# EAGLE board Thin_Spacer_B (EAGLE 9.5.2)
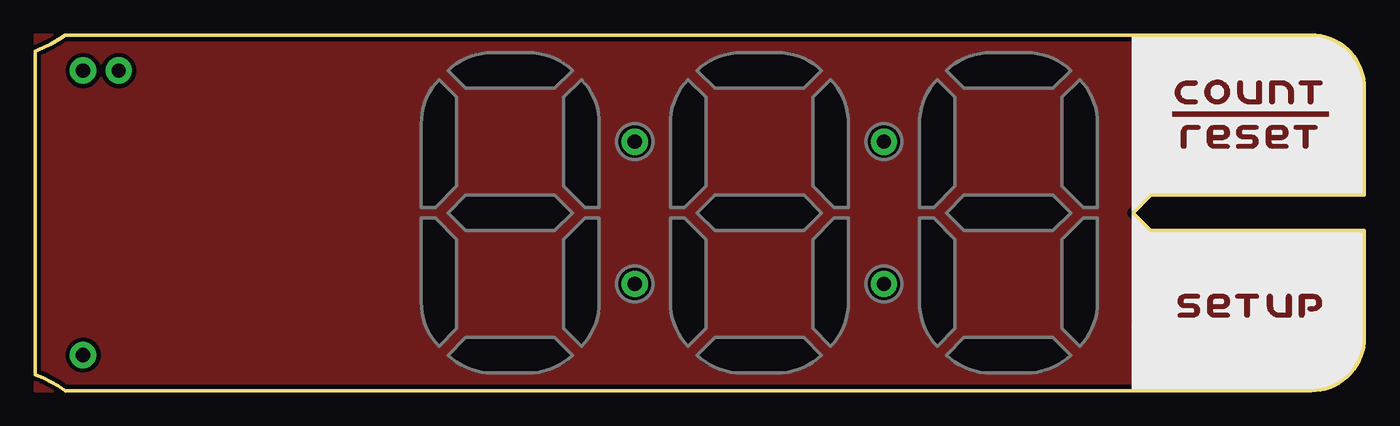
[diagram p0: board, top side]
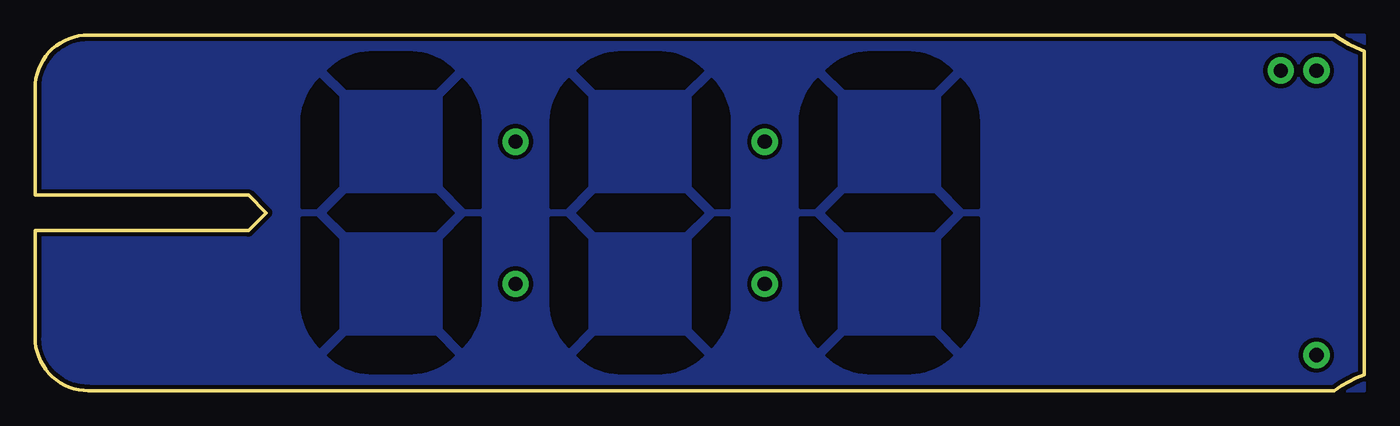
[diagram p1: board, bottom side, seen from below]

Size 94.87 x 25.4 mm. Coordinates in mm from the lower left corner, seen from the top.
Outline: 94.87,21.59 94.87,13.97 79.63,13.97 78.36,12.7 79.63,11.43 94.87,11.43 94.87,3.81 arc-90 91.06,0 2.16,0 arc16 0,1.14 0,24.26 arc16 2.16,25.4 91.06,25.4 arc-90 94.87,21.59
Copper layers (1*16): Top 0.035mm / dielectric 1.5mm / Bottom 0.035mm
Design rules "SparkFun-2-Layer-Minimum-JLCPCB": minimum track width 5mil, minimum drill 0.3mm, track to track 5mil, track to pad 5mil, pad to pad 5mil, via to via 5mil, smd to smd 5mil, copper to edge 7mil, drill to drill 7mil, minimum pad ring 5mil, minimum via ring 5mil, stop-mask expansion 4mil, vias tented up to drill 25mil, thermal gap 10mil

## Placement (x,y rotation side)
U$1  [#COUNT#0]  86.74,21.34 0 top
U$2  [#RESET#0]  86.74,18.16 0 top
U$3  [#SETUP#0]  86.74,6.1 0 top

## Library data of the parts
U$1-U$3 = output

## Tracks (layer width: path | path; a pad name or v marks a point on that pad's centre or on a via)
MASKBTM
  pour Bottom (isolate 0.305): 0,25.4 91.06,25.4 arc-90 94.87,21.59 94.87,13.97 79.63,13.97 78.36,12.7 79.63,11.43 94.87,11.43 94.87,3.81 arc-90 91.06,0 0,0
MASKTP
  pour Top (isolate 0.305): 0,25.4 91.06,25.4 arc-90 94.87,21.59 94.87,13.97 79.63,13.97 78.36,12.7 79.63,11.43 94.87,11.43 94.87,3.81 arc-90 91.06,0 0,0
N$23  (via drill 1.02 pad 1.88)
  other vias: 5.97,22.86
N$24  (via drill 1.02 pad 1.88)
  other vias: 3.43,22.86
N$25  (via drill 1.02 pad 1.88)
  other vias: 3.43,2.54
N$26  (via drill 1.02 pad 1.88)
  other vias: 60.58,7.62
N$27  (via drill 1.02 pad 1.88)
  other vias: 60.58,17.78
N$28  (via drill 1.02 pad 1.88)
  other vias: 42.8,17.78
N$29  (via drill 1.02 pad 1.88)
  other vias: 42.8,7.62
N$52
  cutout Bottom: 33.91,24.13 33.91,21.59 37.08,21.59 38.35,22.86 38.07,23.11 37.85,23.29 37.62,23.44 37.36,23.6 37.11,23.72 36.8,23.85 36.42,23.98 36.09,24.05 35.74,24.1 35.43,24.13
N$53
  cutout Bottom: 38.99,22.23 37.72,20.95 37.72,14.61 39.24,13.08 40.26,13.08 40.26,19.28 40.23,19.58 40.18,19.94 40.13,20.17 40.08,20.35 39.98,20.65 39.9,20.83 39.78,21.11 39.62,21.39 39.47,21.64 39.24,21.95
N$54
  cutout Bottom: 33.91,24.13 33.91,21.59 30.73,21.59 29.46,22.86 29.74,23.11 29.97,23.29 30.2,23.44 30.45,23.6 30.71,23.72 31.01,23.85 31.39,23.98 31.72,24.05 32.08,24.1 32.38,24.13
N$55
  cutout Bottom: 28.83,22.23 30.1,20.95 30.1,14.61 28.57,13.08 27.56,13.08 27.56,19.28 27.58,19.58 27.64,19.94 27.69,20.17 27.74,20.35 27.84,20.65 27.91,20.83 28.04,21.11 28.19,21.39 28.35,21.64 28.57,21.95
N$56
  cutout Bottom: 33.91,1.27 33.91,3.81 37.08,3.81 38.35,2.54 38.07,2.29 37.85,2.11 37.62,1.96 37.36,1.8 37.11,1.68 36.8,1.55 36.42,1.42 36.09,1.35 35.74,1.3 35.43,1.27
N$57
  cutout Bottom: 38.99,3.17 37.72,4.45 37.72,10.79 39.24,12.32 40.26,12.32 40.26,6.12 40.23,5.82 40.18,5.46 40.13,5.23 40.08,5.05 39.98,4.75 39.9,4.57 39.78,4.29 39.62,4.01 39.47,3.76 39.24,3.45
N$58
  cutout Bottom: 33.91,1.27 33.91,3.81 30.73,3.81 29.46,2.54 29.74,2.29 29.97,2.11 30.2,1.96 30.45,1.8 30.71,1.68 31.01,1.55 31.39,1.42 31.72,1.35 32.08,1.3 32.38,1.27
N$59
  cutout Bottom: 28.83,3.17 30.1,4.45 30.1,10.79 28.57,12.32 27.56,12.32 27.56,6.12 27.58,5.82 27.64,5.46 27.69,5.23 27.74,5.05 27.84,4.75 27.91,4.57 28.04,4.29 28.19,4.01 28.35,3.76 28.57,3.45
N$60
  cutout Bottom: 29.46,12.7 30.73,13.97 37.08,13.97 38.35,12.7 37.08,11.43 30.73,11.43
N$61
  cutout Top: 33.91,24.13 33.91,21.59 37.08,21.59 38.35,22.86 38.07,23.11 37.85,23.29 37.62,23.44 37.36,23.6 37.11,23.72 36.8,23.85 36.42,23.98 36.09,24.05 35.74,24.1 35.43,24.13
N$62
  cutout Top: 38.99,22.23 37.72,20.95 37.72,14.61 39.24,13.08 40.26,13.08 40.26,19.28 40.23,19.58 40.18,19.94 40.13,20.17 40.08,20.35 39.98,20.65 39.9,20.83 39.78,21.11 39.62,21.39 39.47,21.64 39.24,21.95
N$63
  cutout Top: 33.91,24.13 33.91,21.59 30.73,21.59 29.46,22.86 29.74,23.11 29.97,23.29 30.2,23.44 30.45,23.6 30.71,23.72 31.01,23.85 31.39,23.98 31.72,24.05 32.08,24.1 32.38,24.13
N$64
  cutout Top: 28.83,22.23 30.1,20.95 30.1,14.61 28.57,13.08 27.56,13.08 27.56,19.28 27.58,19.58 27.64,19.94 27.69,20.17 27.74,20.35 27.84,20.65 27.91,20.83 28.04,21.11 28.19,21.39 28.35,21.64 28.57,21.95
N$65
  cutout Top: 33.91,1.27 33.91,3.81 37.08,3.81 38.35,2.54 38.07,2.29 37.85,2.11 37.62,1.96 37.36,1.8 37.11,1.68 36.8,1.55 36.42,1.42 36.09,1.35 35.74,1.3 35.43,1.27
N$66
  cutout Top: 38.99,3.17 37.72,4.45 37.72,10.79 39.24,12.32 40.26,12.32 40.26,6.12 40.23,5.82 40.18,5.46 40.13,5.23 40.08,5.05 39.98,4.75 39.9,4.57 39.78,4.29 39.62,4.01 39.47,3.76 39.24,3.45
N$67
  cutout Top: 33.91,1.27 33.91,3.81 30.73,3.81 29.46,2.54 29.74,2.29 29.97,2.11 30.2,1.96 30.45,1.8 30.71,1.68 31.01,1.55 31.39,1.42 31.72,1.35 32.08,1.3 32.38,1.27
N$68
  cutout Top: 28.83,3.17 30.1,4.45 30.1,10.79 28.57,12.32 27.56,12.32 27.56,6.12 27.58,5.82 27.64,5.46 27.69,5.23 27.74,5.05 27.84,4.75 27.91,4.57 28.04,4.29 28.19,4.01 28.35,3.76 28.57,3.45
N$69
  cutout Top: 29.46,12.7 30.73,13.97 37.08,13.97 38.35,12.7 37.08,11.43 30.73,11.43
N$70
  cutout Bottom: 51.69,24.13 51.69,21.59 54.86,21.59 56.13,22.86 55.85,23.11 55.63,23.29 55.4,23.44 55.14,23.6 54.89,23.72 54.58,23.85 54.2,23.98 53.87,24.05 53.52,24.1 53.21,24.13
N$71
  cutout Bottom: 56.77,22.23 55.5,20.95 55.5,14.61 57.02,13.08 58.04,13.08 58.04,19.28 58.01,19.58 57.96,19.94 57.91,20.17 57.86,20.35 57.76,20.65 57.68,20.83 57.56,21.11 57.4,21.39 57.25,21.64 57.02,21.95
N$72
  cutout Bottom: 51.69,24.13 51.69,21.59 48.51,21.59 47.24,22.86 47.52,23.11 47.75,23.29 47.98,23.44 48.23,23.6 48.49,23.72 48.79,23.85 49.17,23.98 49.5,24.05 49.86,24.1 50.16,24.13
N$73
  cutout Bottom: 46.61,22.23 47.88,20.95 47.88,14.61 46.35,13.08 45.34,13.08 45.34,19.28 45.36,19.58 45.42,19.94 45.47,20.17 45.52,20.35 45.62,20.65 45.69,20.83 45.82,21.11 45.97,21.39 46.13,21.64 46.35,21.95
N$74
  cutout Bottom: 51.69,1.27 51.69,3.81 54.86,3.81 56.13,2.54 55.85,2.29 55.63,2.11 55.4,1.96 55.14,1.8 54.89,1.68 54.58,1.55 54.2,1.42 53.87,1.35 53.52,1.3 53.21,1.27
N$75
  cutout Bottom: 56.77,3.17 55.5,4.45 55.5,10.79 57.02,12.32 58.04,12.32 58.04,6.12 58.01,5.82 57.96,5.46 57.91,5.23 57.86,5.05 57.76,4.75 57.68,4.57 57.56,4.29 57.4,4.01 57.25,3.76 57.02,3.45
N$76
  cutout Bottom: 51.69,1.27 51.69,3.81 48.51,3.81 47.24,2.54 47.52,2.29 47.75,2.11 47.98,1.96 48.23,1.8 48.49,1.68 48.79,1.55 49.17,1.42 49.5,1.35 49.86,1.3 50.16,1.27
N$77
  cutout Bottom: 46.61,3.17 47.88,4.45 47.88,10.79 46.35,12.32 45.34,12.32 45.34,6.12 45.36,5.82 45.42,5.46 45.47,5.23 45.52,5.05 45.62,4.75 45.69,4.57 45.82,4.29 45.97,4.01 46.13,3.76 46.35,3.45
N$78
  cutout Bottom: 47.24,12.7 48.51,13.97 54.86,13.97 56.13,12.7 54.86,11.43 48.51,11.43
N$79
  cutout Top: 51.69,24.13 51.69,21.59 54.86,21.59 56.13,22.86 55.85,23.11 55.63,23.29 55.4,23.44 55.14,23.6 54.89,23.72 54.58,23.85 54.2,23.98 53.87,24.05 53.52,24.1 53.21,24.13
N$80
  cutout Top: 56.77,22.23 55.5,20.95 55.5,14.61 57.02,13.08 58.04,13.08 58.04,19.28 58.01,19.58 57.96,19.94 57.91,20.17 57.86,20.35 57.76,20.65 57.68,20.83 57.56,21.11 57.4,21.39 57.25,21.64 57.02,21.95
N$81
  cutout Top: 51.69,24.13 51.69,21.59 48.51,21.59 47.24,22.86 47.52,23.11 47.75,23.29 47.98,23.44 48.23,23.6 48.49,23.72 48.79,23.85 49.17,23.98 49.5,24.05 49.86,24.1 50.16,24.13
N$82
  cutout Top: 46.61,22.23 47.88,20.95 47.88,14.61 46.35,13.08 45.34,13.08 45.34,19.28 45.36,19.58 45.42,19.94 45.47,20.17 45.52,20.35 45.62,20.65 45.69,20.83 45.82,21.11 45.97,21.39 46.13,21.64 46.35,21.95
N$83
  cutout Top: 51.69,1.27 51.69,3.81 54.86,3.81 56.13,2.54 55.85,2.29 55.63,2.11 55.4,1.96 55.14,1.8 54.89,1.68 54.58,1.55 54.2,1.42 53.87,1.35 53.52,1.3 53.21,1.27
N$84
  cutout Top: 56.77,3.17 55.5,4.45 55.5,10.79 57.02,12.32 58.04,12.32 58.04,6.12 58.01,5.82 57.96,5.46 57.91,5.23 57.86,5.05 57.76,4.75 57.68,4.57 57.56,4.29 57.4,4.01 57.25,3.76 57.02,3.45
N$85
  cutout Top: 51.69,1.27 51.69,3.81 48.51,3.81 47.24,2.54 47.52,2.29 47.75,2.11 47.98,1.96 48.23,1.8 48.49,1.68 48.79,1.55 49.17,1.42 49.5,1.35 49.86,1.3 50.16,1.27
N$86
  cutout Top: 46.61,3.17 47.88,4.45 47.88,10.79 46.35,12.32 45.34,12.32 45.34,6.12 45.36,5.82 45.42,5.46 45.47,5.23 45.52,5.05 45.62,4.75 45.69,4.57 45.82,4.29 45.97,4.01 46.13,3.76 46.35,3.45
N$87
  cutout Top: 47.24,12.7 48.51,13.97 54.86,13.97 56.13,12.7 54.86,11.43 48.51,11.43
N$88
  cutout Bottom: 69.47,24.13 69.47,21.59 72.64,21.59 73.91,22.86 73.63,23.11 73.41,23.29 73.18,23.44 72.92,23.6 72.67,23.72 72.36,23.85 71.98,23.98 71.65,24.05 71.3,24.1 70.99,24.13
N$89
  cutout Bottom: 74.55,22.23 73.28,20.95 73.28,14.61 74.8,13.08 75.82,13.08 75.82,19.28 75.79,19.58 75.74,19.94 75.69,20.17 75.64,20.35 75.54,20.65 75.46,20.83 75.34,21.11 75.18,21.39 75.03,21.64 74.8,21.95
N$90
  cutout Bottom: 69.47,24.13 69.47,21.59 66.29,21.59 65.02,22.86 65.3,23.11 65.53,23.29 65.76,23.44 66.01,23.6 66.27,23.72 66.57,23.85 66.95,23.98 67.28,24.05 67.64,24.1 67.94,24.13
N$91
  cutout Bottom: 64.39,22.23 65.66,20.95 65.66,14.61 64.14,13.08 63.12,13.08 63.12,19.28 63.14,19.58 63.2,19.94 63.25,20.17 63.3,20.35 63.4,20.65 63.47,20.83 63.6,21.11 63.75,21.39 63.91,21.64 64.14,21.95
N$92
  cutout Bottom: 69.47,1.27 69.47,3.81 72.64,3.81 73.91,2.54 73.63,2.29 73.41,2.11 73.18,1.96 72.92,1.8 72.67,1.68 72.36,1.55 71.98,1.42 71.65,1.35 71.3,1.3 70.99,1.27
N$93
  cutout Bottom: 74.55,3.17 73.28,4.45 73.28,10.79 74.8,12.32 75.82,12.32 75.82,6.12 75.79,5.82 75.74,5.46 75.69,5.23 75.64,5.05 75.54,4.75 75.46,4.57 75.34,4.29 75.18,4.01 75.03,3.76 74.8,3.45
N$94
  cutout Bottom: 69.47,1.27 69.47,3.81 66.29,3.81 65.02,2.54 65.3,2.29 65.53,2.11 65.76,1.96 66.01,1.8 66.27,1.68 66.57,1.55 66.95,1.42 67.28,1.35 67.64,1.3 67.94,1.27
N$95
  cutout Bottom: 64.39,3.17 65.66,4.45 65.66,10.79 64.14,12.32 63.12,12.32 63.12,6.12 63.14,5.82 63.2,5.46 63.25,5.23 63.3,5.05 63.4,4.75 63.47,4.57 63.6,4.29 63.75,4.01 63.91,3.76 64.14,3.45
N$96
  cutout Bottom: 65.02,12.7 66.29,13.97 72.64,13.97 73.91,12.7 72.64,11.43 66.29,11.43
N$97
  cutout Top: 69.47,24.13 69.47,21.59 72.64,21.59 73.91,22.86 73.63,23.11 73.41,23.29 73.18,23.44 72.92,23.6 72.67,23.72 72.36,23.85 71.98,23.98 71.65,24.05 71.3,24.1 70.99,24.13
N$98
  cutout Top: 74.55,22.23 73.28,20.95 73.28,14.61 74.8,13.08 75.82,13.08 75.82,19.28 75.79,19.58 75.74,19.94 75.69,20.17 75.64,20.35 75.54,20.65 75.46,20.83 75.34,21.11 75.18,21.39 75.03,21.64 74.8,21.95
N$99
  cutout Top: 69.47,24.13 69.47,21.59 66.29,21.59 65.02,22.86 65.3,23.11 65.53,23.29 65.76,23.44 66.01,23.6 66.27,23.72 66.57,23.85 66.95,23.98 67.28,24.05 67.64,24.1 67.94,24.13
N$100
  cutout Top: 64.39,22.23 65.66,20.95 65.66,14.61 64.14,13.08 63.12,13.08 63.12,19.28 63.14,19.58 63.2,19.94 63.25,20.17 63.3,20.35 63.4,20.65 63.47,20.83 63.6,21.11 63.75,21.39 63.91,21.64 64.14,21.95
N$101
  cutout Top: 69.47,1.27 69.47,3.81 72.64,3.81 73.91,2.54 73.63,2.29 73.41,2.11 73.18,1.96 72.92,1.8 72.67,1.68 72.36,1.55 71.98,1.42 71.65,1.35 71.3,1.3 70.99,1.27
N$102
  cutout Top: 74.55,3.17 73.28,4.45 73.28,10.79 74.8,12.32 75.82,12.32 75.82,6.12 75.79,5.82 75.74,5.46 75.69,5.23 75.64,5.05 75.54,4.75 75.46,4.57 75.34,4.29 75.18,4.01 75.03,3.76 74.8,3.45
N$103
  cutout Top: 69.47,1.27 69.47,3.81 66.29,3.81 65.02,2.54 65.3,2.29 65.53,2.11 65.76,1.96 66.01,1.8 66.27,1.68 66.57,1.55 66.95,1.42 67.28,1.35 67.64,1.3 67.94,1.27
N$104
  cutout Top: 64.39,3.17 65.66,4.45 65.66,10.79 64.14,12.32 63.12,12.32 63.12,6.12 63.14,5.82 63.2,5.46 63.25,5.23 63.3,5.05 63.4,4.75 63.47,4.57 63.6,4.29 63.75,4.01 63.91,3.76 64.14,3.45
N$105
  cutout Top: 65.02,12.7 66.29,13.97 72.64,13.97 73.91,12.7 72.64,11.43 66.29,11.43